# Altium PCB PCB1.PcbDoc
Units mm, origin at the board's own origin, x right, y up, seen from the top; angles counter-clockwise.
Board outline 27 x 17 mm, 2 copper layers (Top Layer, Bottom Layer); 9 components, 6 nets, 20 pads, 0 vias.
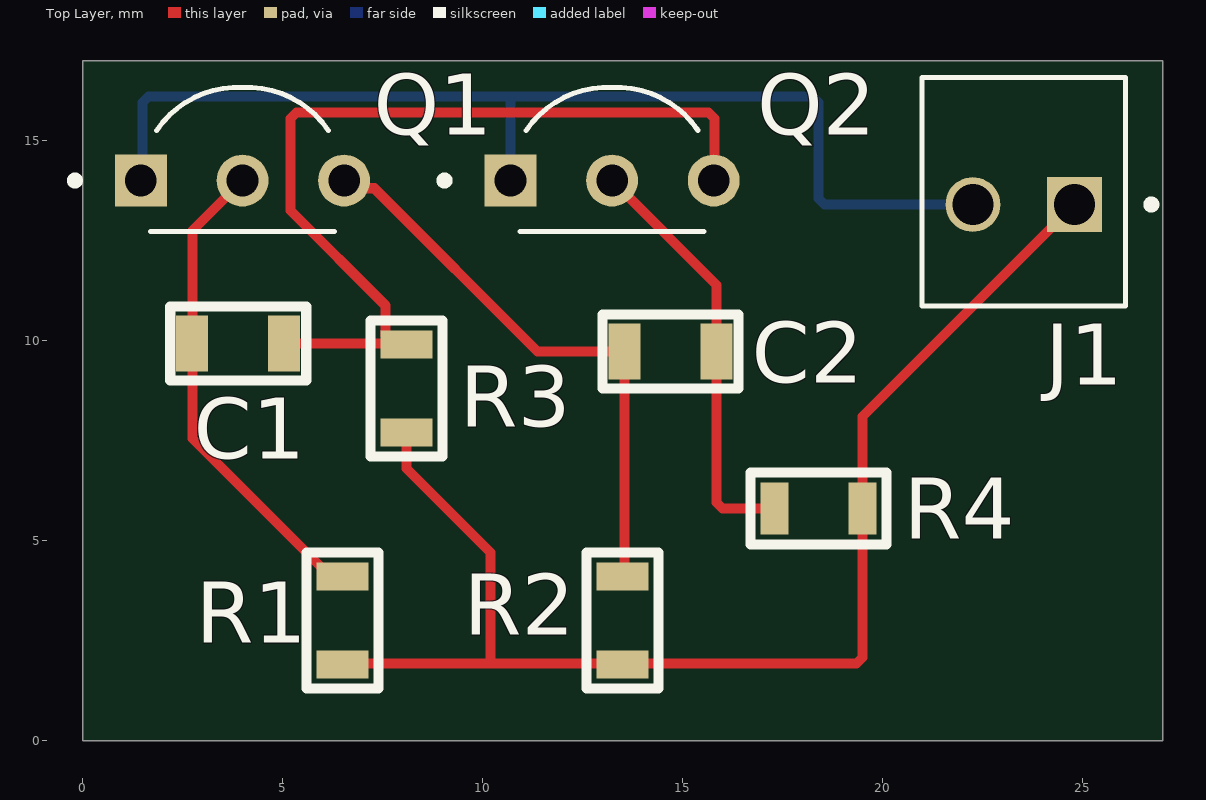
[diagram p0: Top Layer view]
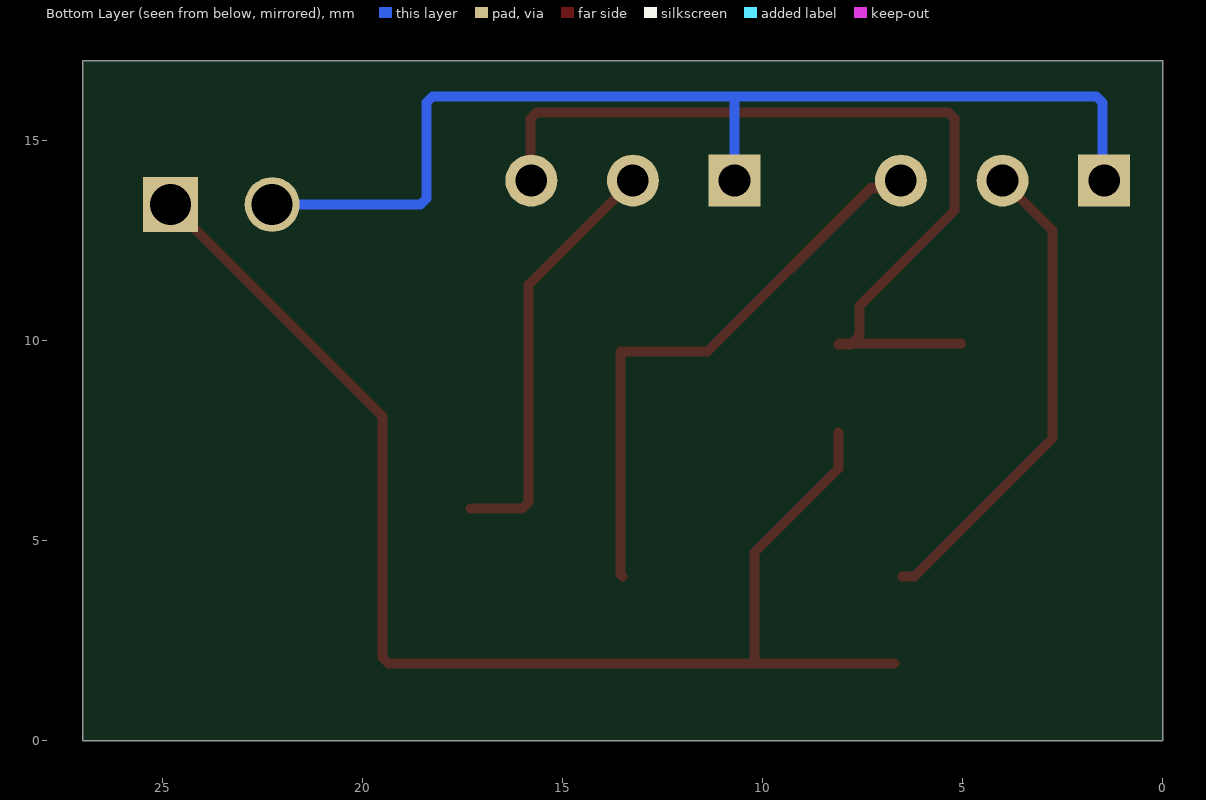
[diagram p1: Bottom Layer view, seen from below]
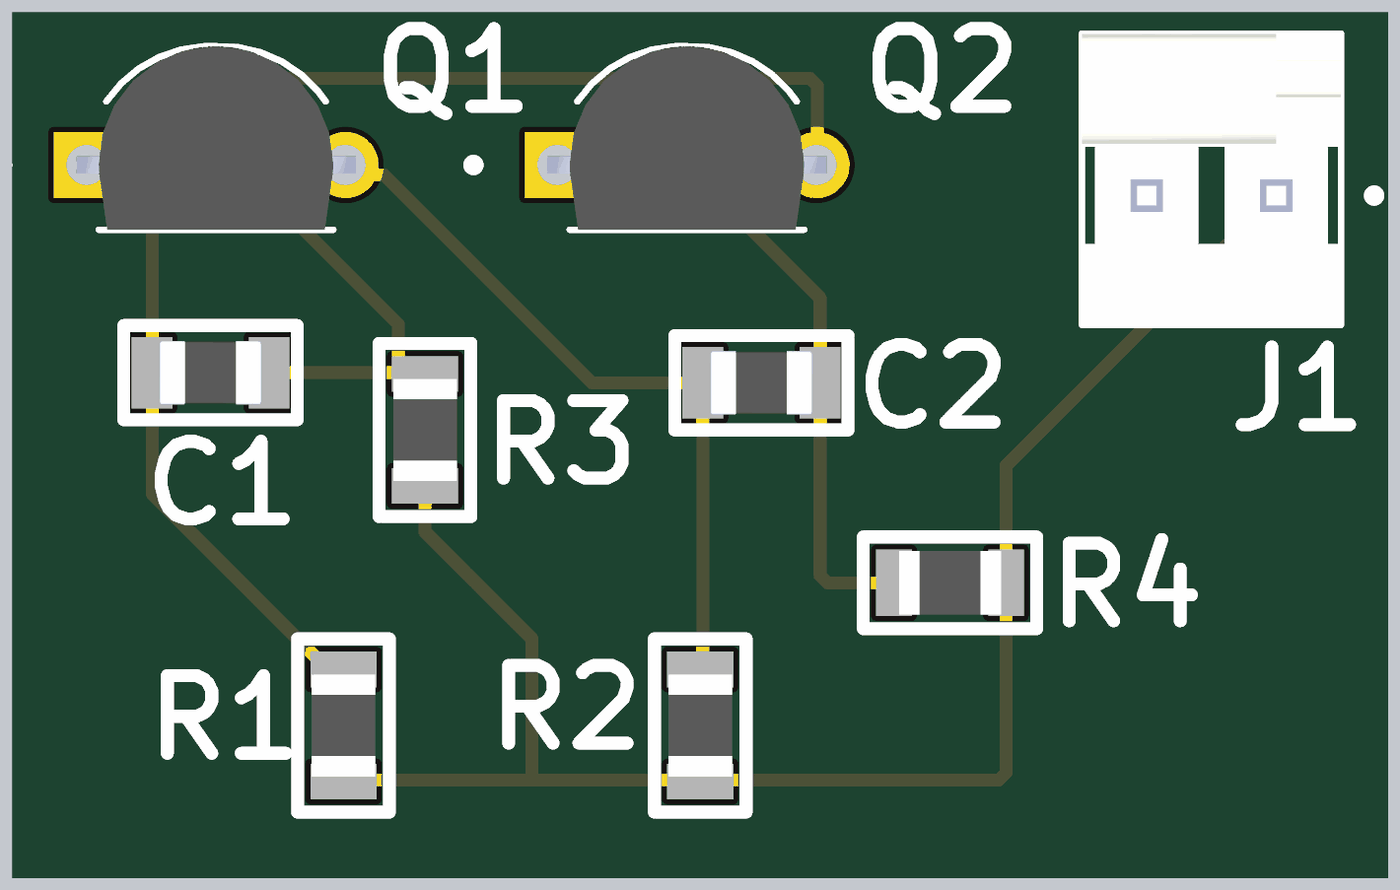
[diagram p2: 3D render of the assembled board from above, using the file's embedded part models]

## Layer stack, top to bottom
Top Solder: solder mask 0.0102, Solder Resist, Dk 3.5
Top Layer: signal copper 0.0356
Dielectric 1: dielectric 0.32, FR-4, Dk 4.8
Bottom Layer: signal copper 0.0356
Bottom Solder: solder mask 0.0102, Solder Resist, Dk 3.5

## Board outline
0,0 27,0 27,17 0,17

## Design rules (kind name [scope] priority, off if disabled: settings)
Clearance [All] p1: gap=0.254 ignorepadtopadclearanceinfootprint=FALSE
PolygonConnect [All] p1: connectstyle=Relief reliefconductorwidth=0.254 reliefentries=4 polygonreliefangle="90 Angle" airgapwidth=0.254
RoutingVias [All] p1: holewidth=0.711 width=1.27 viastyle="Through Hole" minholewidth=0.711 minwidth=1.27 maxholewidth=0.711 maxwidth=1.27
SolderMaskExpansion [All] p1: expansion=0.102 istentingtop=FALSE
SupplyNets "Schematic Supply Nets" [InNet('GND')] p1: voltage=0.000
Width [All] p1: maxlimit=0.254 minlimit=0.254 preferedwidth=0.254
30 further rules are at their usual default settings.

## Components (designator, comment, footprint, x,y, rotation, side; value= is the part's Value field where it differs from the comment)
C1 "Cap" Cap 3.992,10.1 r0 top
C2 "Cap" Cap 14.8,9.9 r0 top
J1 "640456-2" TE_640456-2 24.8,13.4 r0 top
Q1 "2N3904" TO92254P460H750-3 4,14 r0 top
Q2 "2N3904" TO92254P460H750-3 13.24,14 r0 top
R1 "Res" "Res 1" 6.5,3 r270 top
R2 "Res" "Res 1" 13.5,3 r270 top
R3 "Res" "Res 1" 8.1,8.8 r270 top
R4 "Res" "Res 1" 18.4,5.8 r0 top

## Footprints (in the part's own frame and the unit in brackets; to place one, negate y for a bottom-side part, rotate by r counter-clockwise, add the part's x,y. Pads: shape width x height; smd on the part's side, far side on the other; paste and mask are expansions set on the pad)
Cap [mm]
  rect 0.8x1.4 smd: 1(-1.25,-0.175) 2(1.05,-0.175)
  silkscreen extent -1.8,-1.1 1.6,0.75, body extent -1.1,-0.8 0.9,0.45, height 0.8
"Res 1" [mm]
  rect 0.7x1.3 smd: 1(-1.1,0) 2(1.1,0)
  silkscreen extent -1.7,-0.9 1.7,0.9, body extent -1,-0.63 1,0.63, height 0.65
TE_640456-2 [mm]
  rect 1.37x1.37 / inner round 1.37 / far side rect 1.37x1.37 hole 1.02: 1(0,0)
  round 1.37 hole 1.02: 2(-2.54,0)
  silkscreen extent -3.81,-2.54 2.02,3.18, body extent -3.81,-2.54 1.27,3.17, height 10.03
TO92254P460H750-3 [mm]
  rect 1.298x1.298 / inner round 1.298 / far side rect 1.298x1.298 hole 0.79: 1(-2.54,0)
  round 1.298 hole 0.79: 2(0,0) 3(2.54,0)
  silkscreen extent -4.29,-1.27 2.3,2.33, body extent -2.74,-1.27 2.74,2.33, height 8.09

## Part data
J1: "Header Friction Lock MTA-100 2 250 VAC Polyester Tin Copper Alloy Tin", Package=None, Check_prices=https://www.snapeda.com/parts/640456-2/TE+Connectivity+AMP+Connectors/view-part/?ref=eda, MF="TE Connectivity", MP=640456-2, SnapEDA_Link=https://www.snapeda.com/parts/640456-2/TE+Connectivity+AMP+Connectors/view-part/?ref=snap
Q1 Q2: "BJT, TO-92, 40V, 200mA, NPN, 0.625W, 150Â°C", Package="TO-92 Diotec", Check_prices=https://www.snapeda.com/parts/2N3904/Diotec/view-part/?ref=eda, MF="Diotec Semiconductor", MP=2N3904, SnapEDA_Link=https://www.snapeda.com/parts/2N3904/Diotec/view-part/?ref=snap

## Nets (pads, with @x,y where several pads share a name; then routed paths per layer and width w, separated by ;. In a path a pad name is that pad's centre, name@x,y a point inside that pad or via, vN(x,y) a via of type N, cw(c..) or ccw(c..) an arc to the next point about the centre after c; other vN are vias at no path point)
12V: J1.1 R1.2 R2.2 R3.2 R4.2 | length 33
  Top Layer w0.254: R1.2@6.7,1.925 10.2,1.925 ; R3.2 8.1,6.8 10.2,4.7 10.2,1.925 ; J1.1 19.5,8.1 R4.2 19.5,2.074 19.351,1.925 13.5,1.925 10.2,1.925
GND: J1.2 Q1.1 Q2.1 | length 27.4
  Bottom Layer w0.254: Q1.1 1.5,14.04 1.5,15.951 1.649,16.1 10.7,16.1 ; Q2.1 10.7,16.1 ; J1.2 18.549,13.4 18.4,13.549 18.4,15.951 18.251,16.1 10.7,16.1
NetC1_1: C1.1 Q1.2 R1.1 | length 12.1
  Top Layer w0.254: Q1.2 2.75,12.75 2.75,9.925 2.75,7.55 6.2,4.1 R1.1
NetC1_2: C1.2 Q2.3 R3.1 | length 22.4
  Top Layer w0.254: C1.2 8.075,9.925 R3.1 7.8,9.9 7.577,10.123 7.577,10.873 5.2,13.25 5.2,15.551 5.349,15.7 15.651,15.7 15.8,15.551 15.8,14.02 Q2.3
NetC2_1: C2.1 Q1.3 R2.1 | length 14.4
  Top Layer w0.254: Q1.3 6.734,13.806 7.294,13.806 11.375,9.725 C2.1 13.55,4.15 R2.1
NetC2_2: C2.2 Q2.2 R4.1 | length 10.6
  Top Layer w0.254: Q2.2 15.85,11.39 C2.2 15.85,5.949 15.999,5.8 R4.1

## Silkscreen, mask and mechanical layers (free items; w line width, h text height)
Mechanical 1:
  the board outline again, w0.254